# Altium PCB ESP32 with USBC PCB V1I1.PcbDoc (part 2 of 3)
Units mil, origin at the board's own origin, x right, y up, seen from the top; angles counter-clockwise.
Board outline 3020 x 1968.5 mil, 4 copper layers (L1, L2, L3, L4), stack 61.581 mil thick; 65 components, 78 nets, 406 pads, 141 vias.
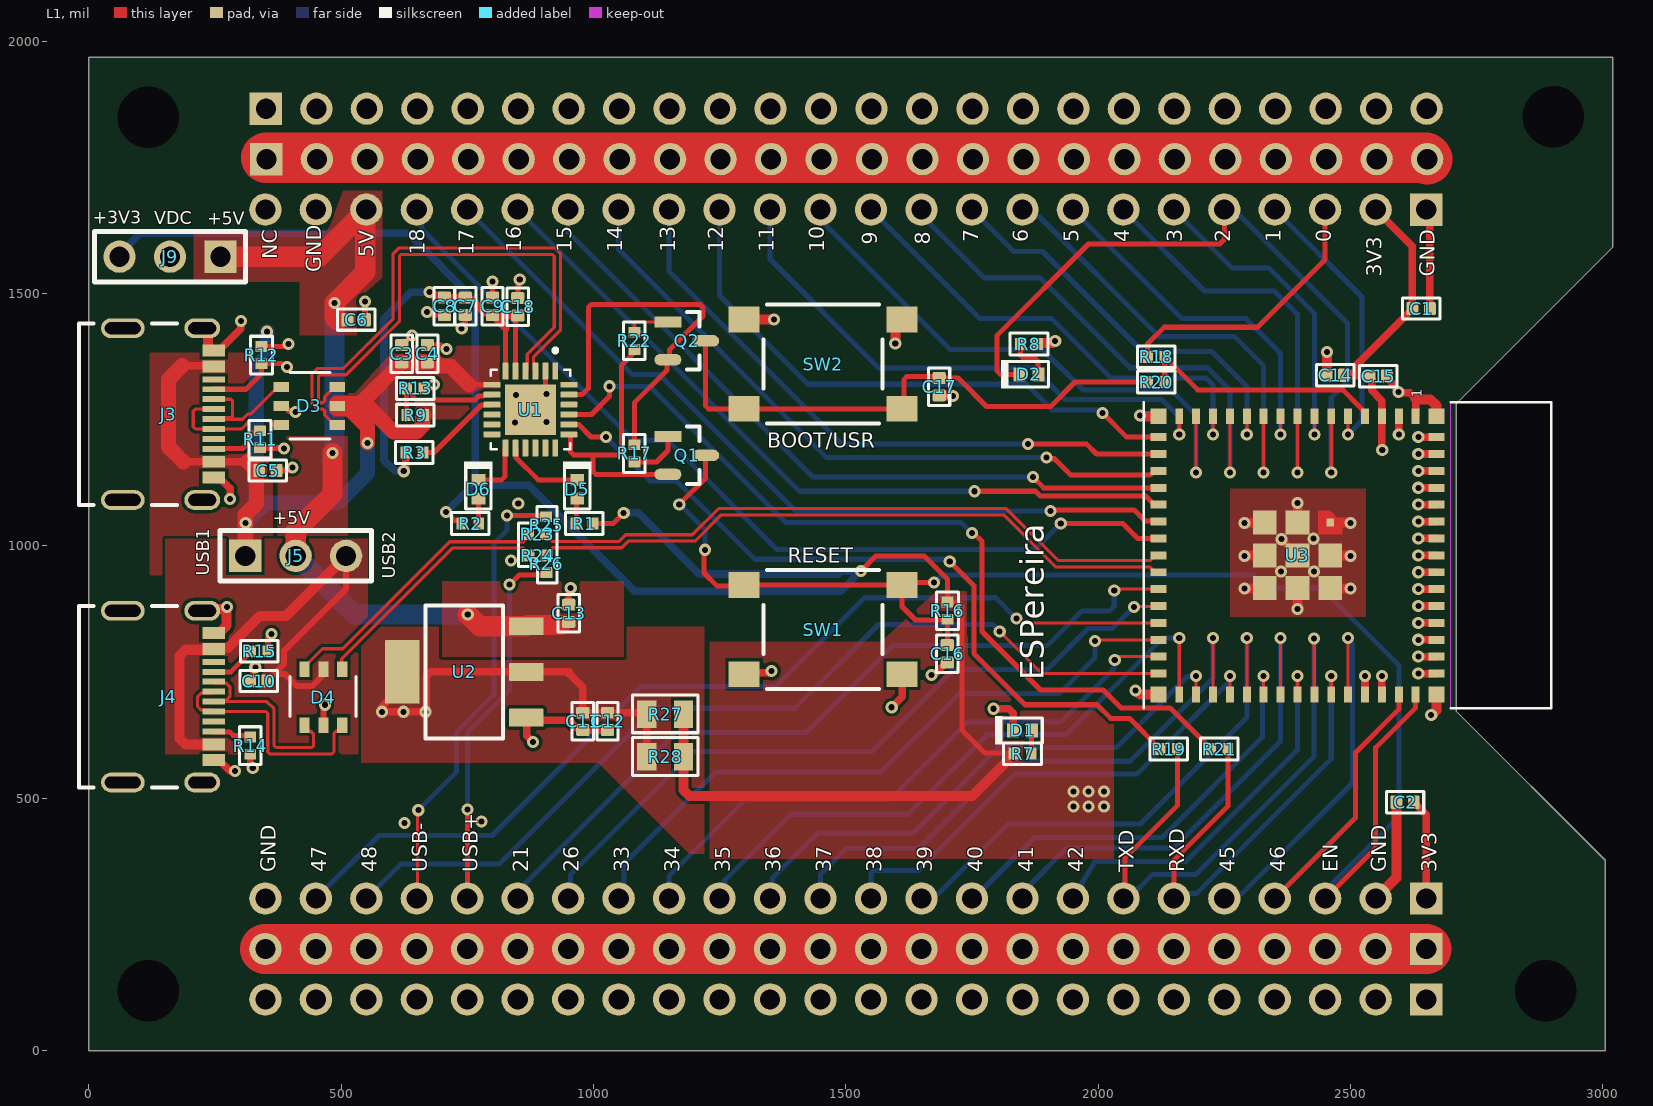
[diagram p0: L1 view]

## Part data (continued)
R9: library part RC0402FR-074K7L, "RES 4.7K OHM 1% 1/16W 0402", Case Code (Imperial)=0402, Case Code (Metric)=1005, Manufacturer="Yageo Group", Max Operating Temperature=155°C, Min Operating Temperature=-55°C, Power Rating=62.5mW, Supplier Part Number=311-4.7KLRDKR-ND, Temperature Coefficient=100ppm/°C, Tolerance=1%, Voltage Rating=50V, Case/Package=0402, Category="Chip SMD Resistors", China RoHS=Non-Compliant, ComponentLink1Description=https://datasheet.octopart.com:443/RC0402FR-074K7L-Yageo-datasheet-175887523.pdf?src-supplier=IHS, ComponentLink1URL=https://datasheet.octopart.com:443/RC0402FR-074K7L-Yageo-datasheet-175887523.pdf?src-supplier=IHS, ComponentLink2Description=https://datasheet.octopart.com:443/RC0402FR-074K7L-Yageo-datasheet-103092701.pdf?src-supplier=Upverter, ComponentLink2URL=https://datasheet.octopart.com:443/RC0402FR-074K7L-Yageo-datasheet-103092701.pdf?src-supplier=Upverter, ComponentLink3Description=https://datasheet.octopart.com:443/RC0402FR-074K7L-Yageo-datasheet-98239111.pdf?src-supplier=Upverter, ComponentLink3URL=https://datasheet.octopart.com:443/RC0402FR-074K7L-Yageo-datasheet-98239111.pdf?src-supplier=Upverter, ComponentLink4Description=https://datasheet.octopart.com:443/RC0402FR-074K7L-Yageo-Group-datasheet-190305687.pdf?src-supplier=Future+Electronics, ComponentLink4URL=https://datasheet.octopart.com:443/RC0402FR-074K7L-Yageo-Group-datasheet-190305687.pdf?src-supplier=Future+Electronics, ComponentLink5Description=https://datasheet.octopart.com:443/RC0402FR-074K7L-Yageo-datasheet-164759695.pdf?src-supplier=Future+Electronics, ComponentLink5URL=https://datasheet.octopart.com:443/RC0402FR-074K7L-Yageo-datasheet-164759695.pdf?src-supplier=Future+Electronics, ComponentLink6Description=https://datasheet.octopart.com:443/RC0402FR-074K7L-Yageo-datasheet-137700087.pdf?src-supplier=Future+Electronics, ComponentLink6URL=https://datasheet.octopart.com:443/RC0402FR-074K7L-Yageo-datasheet-137700087.pdf?src-supplier=Future+Electronics, ComponentLink7Description=https://datasheet.octopart.com:443/RC0402FR-074K7L-Yageo-Group-datasheet-190051977.pdf?src-supplier=Newark, ComponentLink7URL=https://datasheet.octopart.com:443/RC0402FR-074K7L-Yageo-Group-datasheet-190051977.pdf?src-supplier=Newark, ComponentLink8Description=https://datasheet.octopart.com:443/RC0402FR-074K7L-Yageo-datasheet-12531192.pdf?src-supplier=Newark, ComponentLink8URL=https://datasheet.octopart.com:443/RC0402FR-074K7L-Yageo-datasheet-12531192.pdf?src-supplier=Newark, ComponentLink9Description=https://datasheet.octopart.com:443/RC0402FR-074K7L-Yageo-datasheet-8324527.pdf?src-supplier=Newark, ComponentLink9URL=https://datasheet.octopart.com:443/RC0402FR-074K7L-Yageo-datasheet-8324527.pdf?src-supplier=Newark, ComponentLink10Description=https://datasheet.octopart.com:443/RC0402FR-074K7L-Yageo-datasheet-10408619.pdf?src-supplier=element14+APAC, ComponentLink10URL=https://datasheet.octopart.com:443/RC0402FR-074K7L-Yageo-datasheet-10408619.pdf?src-supplier=element14+APAC, ComponentLink11Description=https://datasheet.octopart.com:443/RC0402FR-074K7L-Yageo-datasheet-13691069.pdf?src-supplier=element14+APAC, ComponentLink11URL=https://datasheet.octopart.com:443/RC0402FR-074K7L-Yageo-datasheet-13691069.pdf?src-supplier=element14+APAC, ComponentLink12Description=https://datasheet.octopart.com:443/RC0402FR-074K7L-Yageo-datasheet-62067350.pdf?src-supplier=Farnell, ComponentLink12URL=https://datasheet.octopart.com:443/RC0402FR-074K7L-Yageo-datasheet-62067350.pdf?src-supplier=Farnell, ComponentLink13Description=https://datasheet.octopart.com:443/RC0402FR-074K7L-Yageo-datasheet-8329306.pdf?src-supplier=element14, ComponentLink13URL=https://datasheet.octopart.com:443/RC0402FR-074K7L-Yageo-datasheet-8329306.pdf?src-supplier=element14, ComponentLink14Description=https://datasheet.octopart.com:443/RC0402FR-074K7L-Yageo-Group-datasheet-189192902.pdf?src-supplier=LCSC, ComponentLink14URL=https://datasheet.octopart.com:443/RC0402FR-074K7L-Yageo-Group-datasheet-189192902.pdf?src-supplier=LCSC, ComponentLink15Description=https://datasheet.octopart.com:443/RC0402FR-074K7L-Yageo-datasheet-175423674.pdf?src-supplier=SOS+electronic, ComponentLink15URL=https://datasheet.octopart.com:443/RC0402FR-074K7L-Yageo-datasheet-175423674.pdf?src-supplier=SOS+electronic, ComponentLink16Description=https://datasheet.octopart.com:443/RC0402FR-074K7L-Yageo-datasheet-79472498.pdf?src-supplier=Megastar, ComponentLink16URL=https://datasheet.octopart.com:443/RC0402FR-074K7L-Yageo-datasheet-79472498.pdf?src-supplier=Megastar, ComponentLink17Description=https://datasheet.octopart.com/RC0402FR-074K7L-Yageo-datasheet-73766026.pdf, ComponentLink17URL=https://datasheet.octopart.com/RC0402FR-074K7L-Yageo-datasheet-73766026.pdf, ComponentLink18Description=http://sigma.octopart.com:80/conflict_mineral_statement/Yageo-company-3.pdf?src-supplier=Compliance+Statements, ComponentLink18URL=http://sigma.octopart.com:80/conflict_mineral_statement/Yageo-company-3.pdf?src-supplier=Compliance+Statements, ComponentLink19Description=http://sigma.octopart.com:80/rohs_statement/Yageo-company-2.pdf?src-supplier=Compliance+Statements, ComponentLink19URL=http://sigma.octopart.com:80/rohs_statement/Yageo-company-2.pdf?src-supplier=Compliance+Statements, Composition="Thick Film", Country of Origin="Mainland China, Taiwan", Depth=500µm, Export Control Classification Number (ECCN) Code=EAR99, Harmonized Tariff Schedule (HTS) Code=8533.21.00.30, Height=350µm, Introduction Date=2008-07-18, Lead Free="Lead Free", Length=1mm, Lifecycle Status=Production, Manufacturer Part Number=RC0402FR-074K7L, Military Standard=Not, Mounting Technology="Surface Mount", Number of Terminals=2, Packaging="Tape & Reel", Pins=2, Pricing="1=0.1, 10=0.021, 25=0.0152, 50=0.012, 100=0.0097, 250=0.0074, 500=0.00612, 1000=0.00512, 5000=0.00355 (USD)", REACH SVHC=Yes, RoHS=Compliant, Schedule B="8533210045, 8533210045|8533210045, 8533210045|8533210045|8533210045, 8533210045|8533210045|8533210045|8533210045", Stock=2941109, Supplier=DigiKey, Termination=SMD/SMT, Voltage Rating (AC)=50V, Voltage Rating (DC)=50V, Width=500µm, Working Voltage=50V
R11 R12 R14 R15: library part AC0402FR-075K1L, "5.1 kOhms ±1% 0,063W, 1/16W Resistor de chip 0402 (métrico 1005) AEC-Q200 automotivo, resistente a umidade Filme grosso", Case Code (Imperial)=0402, Case Code (Metric)=1005, Manufacturer="Yageo Group", Max Operating Temperature=155°C, Max Power Dissipation=63mW, Min Operating Temperature=-55°C, Power Rating=62.5mW, Ratings=AEC-Q200, Supplier Part Number=YAG3503DKR-ND, Temperature Coefficient=100ppm/°C, Tolerance=1%, Voltage Rating=50V, Case/Package=0402, Category="Chip SMD Resistors", China RoHS=Non-Compliant, ComponentLink1Description=https://datasheet.octopart.com:443/AC0402FR-075K1L-Yageo-datasheet-182189377.pdf?src-supplier=IHS, ComponentLink1URL=https://datasheet.octopart.com:443/AC0402FR-075K1L-Yageo-datasheet-182189377.pdf?src-supplier=IHS, ComponentLink2Description=https://datasheet.octopart.com:443/AC0402FR-075K1L-Yageo-datasheet-83209224.pdf?src-supplier=Upverter, ComponentLink2URL=https://datasheet.octopart.com:443/AC0402FR-075K1L-Yageo-datasheet-83209224.pdf?src-supplier=Upverter, ComponentLink3Description=https://datasheet.octopart.com:443/AC0402FR-075K1L-Yageo-datasheet-178509465.pdf?src-supplier=Newark, ComponentLink3URL=https://datasheet.octopart.com:443/AC0402FR-075K1L-Yageo-datasheet-178509465.pdf?src-supplier=Newark, ComponentLink4Description=https://datasheet.octopart.com/AC0402FR-075K1L-Yageo-datasheet-12512238.pdf, ComponentLink4URL=https://datasheet.octopart.com/AC0402FR-075K1L-Yageo-datasheet-12512238.pdf, ComponentLink5Description=https://datasheet.octopart.com:443/AC0402FR-075K1L-Yageo-Group-datasheet-189830439.pdf?src-supplier=Future+Electronics, ComponentLink5URL=https://datasheet.octopart.com:443/AC0402FR-075K1L-Yageo-Group-datasheet-189830439.pdf?src-supplier=Future+Electronics, ComponentLink6Description=https://datasheet.octopart.com:443/AC0402FR-075K1L-Yageo-datasheet-166720450.pdf?src-supplier=Future+Electronics, ComponentLink6URL=https://datasheet.octopart.com:443/AC0402FR-075K1L-Yageo-datasheet-166720450.pdf?src-supplier=Future+Electronics, ComponentLink7Description=https://datasheet.octopart.com:443/AC0402FR-075K1L-Yageo-datasheet-151884373.pdf?src-supplier=Future+Electronics, ComponentLink7URL=https://datasheet.octopart.com:443/AC0402FR-075K1L-Yageo-datasheet-151884373.pdf?src-supplier=Future+Electronics, ComponentLink8Description=https://datasheet.octopart.com:443/AC0402FR-075K1L-Yageo-datasheet-137699919.pdf?src-supplier=Future+Electronics, ComponentLink8URL=https://datasheet.octopart.com:443/AC0402FR-075K1L-Yageo-datasheet-137699919.pdf?src-supplier=Future+Electronics, ComponentLink9Description=https://datasheet.octopart.com:443/AC0402FR-075K1L-Yageo-datasheet-24580492.pdf?src-supplier=Future+Electronics, ComponentLink9URL=https://datasheet.octopart.com:443/AC0402FR-075K1L-Yageo-datasheet-24580492.pdf?src-supplier=Future+Electronics, ComponentLink10Description=https://datasheet.octopart.com:443/AC0402FR-075K1L-Yageo-datasheet-13029202.pdf?src-supplier=Future+Electronics, ComponentLink10URL=https://datasheet.octopart.com:443/AC0402FR-075K1L-Yageo-datasheet-13029202.pdf?src-supplier=Future+Electronics, ComponentLink11Description=https://datasheet.octopart.com:443/AC0402FR-075K1L-Yageo-Group-datasheet-188689268.pdf?src-supplier=LCSC, ComponentLink11URL=https://datasheet.octopart.com:443/AC0402FR-075K1L-Yageo-Group-datasheet-188689268.pdf?src-supplier=LCSC, ComponentLink12Description=https://datasheet.octopart.com:443/AC0402FR-075K1L-Yageo-Group-datasheet-164768995.pdf?src-supplier=ODG+(Origin+Data+Global), ComponentLink12URL=https://datasheet.octopart.com:443/AC0402FR-075K1L-Yageo-Group-datasheet-164768995.pdf?src-supplier=ODG+(Origin+Data+Global), ComponentLink13Description=http://sigma.octopart.com:80/conflict_mineral_statement/Yageo-company-3.pdf?src-supplier=Compliance+Statements, ComponentLink13URL=http://sigma.octopart.com:80/conflict_mineral_statement/Yageo-company-3.pdf?src-supplier=Compliance+Statements, ComponentLink14Description=http://sigma.octopart.com:80/rohs_statement/Yageo-company-2.pdf?src-supplier=Compliance+Statements, ComponentLink14URL=http://sigma.octopart.com:80/rohs_statement/Yageo-company-2.pdf?src-supplier=Compliance+Statements, Composition="Thick Film", Country of Origin="Mainland China, Taiwan", Depth=500µm, Export Control Classification Number (ECCN) Code=EAR99, Features="Automotive AEC-Q200, Moisture Resistant", Harmonized Tariff Schedule (HTS) Code=8533.21.00.30, Height=320µm, Introduction Date=2012-04-10, Lead Free="Lead Free", Length=1mm, Lifecycle Status=Production, Manufacturer Part Number=AC0402FR-075K1L, Military Standard=Not, Mounting Technology="Surface Mount", Number of Terminals=2, Number of Terminations=2, Pricing="1=0.11, 10=0.025, 25=0.0184, 50=0.0148, 100=0.012, 250=0.00928, 500=0.0077, 1000=0.00649, 5000=0.00457 (USD)", REACH SVHC=Yes, RoHS=Compliant, Schedule B="8533210045, 8533210045|8533210045|8533210045|8533210045|8533210045|8533210045|8533210045|8533210045|8533210045|8533210045|8533210045|8533210045|8533210045|8533210045|8533210045|8533210045|8533210045|8533210045|8533210045|8533210045|8533210045|8533210045|8533210045|85", Supplier=DigiKey, Width=500µm, Working Voltage=50V
R13 R16 R17 R22: library part AC0402FR-0710KL, "10 kOhms ±1% 0,063W, 1/16W Resistor de chip 0402 (métrico 1005) AEC-Q200 automotivo, resistente a umidade Filme grosso", Case Code (Imperial)=0402, Case Code (Metric)=1005, Manufacturer="Yageo Group", Max Operating Temperature=155°C, Max Power Dissipation=63mW, Min Operating Temperature=-55°C, Power Rating=62.5mW, Ratings=AEC-Q200, Supplier Part Number=YAG3436DKR-ND, Temperature Coefficient=100ppm/°C, Tolerance=1%, Voltage Rating=50V, Case/Package=0402, Category="Chip SMD Resistors", China RoHS=Non-Compliant, ComponentLink1Description=https://datasheet.octopart.com:443/AC0402FR-0710KL-Yageo-datasheet-182189377.pdf?src-supplier=IHS, ComponentLink1URL=https://datasheet.octopart.com:443/AC0402FR-0710KL-Yageo-datasheet-182189377.pdf?src-supplier=IHS, ComponentLink2Description=https://datasheet.octopart.com:443/AC0402FR-0710KL-Yageo-datasheet-83209224.pdf?src-supplier=Upverter, ComponentLink2URL=https://datasheet.octopart.com:443/AC0402FR-0710KL-Yageo-datasheet-83209224.pdf?src-supplier=Upverter, ComponentLink3Description=https://datasheet.octopart.com:443/AC0402FR-0710KL-Yageo-datasheet-178509465.pdf?src-supplier=Newark, ComponentLink3URL=https://datasheet.octopart.com:443/AC0402FR-0710KL-Yageo-datasheet-178509465.pdf?src-supplier=Newark, ComponentLink4Description=https://datasheet.octopart.com:443/AC0402FR-0710KL-Yageo-datasheet-166720450.pdf?src-supplier=JRH+Electronics, ComponentLink4URL=https://datasheet.octopart.com:443/AC0402FR-0710KL-Yageo-datasheet-166720450.pdf?src-supplier=JRH+Electronics, ComponentLink5Description=https://datasheet.octopart.com:443/AC0402FR-0710KL-Yageo-datasheet-151884373.pdf?src-supplier=Future+Electronics, ComponentLink5URL=https://datasheet.octopart.com:443/AC0402FR-0710KL-Yageo-datasheet-151884373.pdf?src-supplier=Future+Electronics, ComponentLink6Description=https://datasheet.octopart.com:443/AC0402FR-0710KL-Yageo-Group-datasheet-189830439.pdf?src-supplier=Future+Electronics, ComponentLink6URL=https://datasheet.octopart.com:443/AC0402FR-0710KL-Yageo-Group-datasheet-189830439.pdf?src-supplier=Future+Electronics, ComponentLink7Description=https://datasheet.octopart.com:443/AC0402FR-0710KL-Yageo-datasheet-137699919.pdf?src-supplier=Future+Electronics, ComponentLink7URL=https://datasheet.octopart.com:443/AC0402FR-0710KL-Yageo-datasheet-137699919.pdf?src-supplier=Future+Electronics, ComponentLink8Description=https://datasheet.octopart.com:443/AC0402FR-0710KL-Yageo-datasheet-24580492.pdf?src-supplier=Future+Electronics, ComponentLink8URL=https://datasheet.octopart.com:443/AC0402FR-0710KL-Yageo-datasheet-24580492.pdf?src-supplier=Future+Electronics, ComponentLink9Description=https://datasheet.octopart.com:443/AC0402FR-0710KL-Yageo-datasheet-13029202.pdf?src-supplier=Future+Electronics, ComponentLink9URL=https://datasheet.octopart.com:443/AC0402FR-0710KL-Yageo-datasheet-13029202.pdf?src-supplier=Future+Electronics, ComponentLink10Description=https://datasheet.octopart.com/AC0402FR-0710KL-Yageo-datasheet-12512238.pdf, ComponentLink10URL=https://datasheet.octopart.com/AC0402FR-0710KL-Yageo-datasheet-12512238.pdf, ComponentLink11Description=https://datasheet.octopart.com:443/AC0402FR-0710KL-Yageo-Group-datasheet-164768995.pdf?src-supplier=ODG+(Origin+Data+Global), ComponentLink11URL=https://datasheet.octopart.com:443/AC0402FR-0710KL-Yageo-Group-datasheet-164768995.pdf?src-supplier=ODG+(Origin+Data+Global), ComponentLink12Description=https://datasheet.octopart.com:443/AC0402FR-0710KL-Yageo-datasheet-128677448.pdf?src-supplier=X-ON, ComponentLink12URL=https://datasheet.octopart.com:443/AC0402FR-0710KL-Yageo-datasheet-128677448.pdf?src-supplier=X-ON, ComponentLink13Description=http://sigma.octopart.com:80/conflict_mineral_statement/Yageo-company-3.pdf?src-supplier=Compliance+Statements, ComponentLink13URL=http://sigma.octopart.com:80/conflict_mineral_statement/Yageo-company-3.pdf?src-supplier=Compliance+Statements, ComponentLink14Description=http://sigma.octopart.com:80/rohs_statement/Yageo-company-2.pdf?src-supplier=Compliance+Statements, ComponentLink14URL=http://sigma.octopart.com:80/rohs_statement/Yageo-company-2.pdf?src-supplier=Compliance+Statements, Composition="Thick Film", Country of Origin="Mainland China, Taiwan", Depth=500µm, Export Control Classification Number (ECCN) Code=EAR99, Features="Automotive AEC-Q200, Moisture Resistant", Harmonized Tariff Schedule (HTS) Code=8533.21.00.30, Height=320µm, Introduction Date=2012-04-10, Lead Free="Lead Free", Length=1mm, Lifecycle Status=Production, Manufacturer Part Number=AC0402FR-0710KL, Military Standard=Not, Mounting Technology="Surface Mount", Number of Terminals=2, Number of Terminations=2, Packaging="Tape & Reel", Pricing="1=0.1, 10=0.024, 25=0.0176, 50=0.014, 100=0.0114, 250=0.00876, 500=0.00726, 1000=0.00612, 5000=0.00431 (USD)", REACH SVHC=Yes, RoHS=Compliant, Schedule B="8533210045, 8533210045|8533210045|8533210045|8533210045|8533210045|8533210045|8533210045|8533210045|8533210045|8533210045|8533210045|8533210045|8533210045|8533210045|8533210045|8533210045|8533210045|8533210045|8533210045, 8533210045|8533210045|8533210045|8533210045|8533210045|8533210045|8533210045|8533210045|8533210045|8533210045|8533210045|8533210045|8533210045|8533210045|8533210045|8533210045|8533210045|8533210045|8533210045|8533210045|8533210045|8533210045|8533210045|85", Stock=2542190, Supplier=DigiKey, Termination=SMD/SMT, Width=500µm, Working Voltage=50V
R18 R20: library part RC0402FR-0727RL, "27 Ohms ±1% 0,063W, 1/16W Resistor de chip 0402 (métrico 1005) Resistente à umidade Filme grosso", Case Code (Imperial)=0402, Case Code (Metric)=1005, Manufacturer="Yageo Group", Max Operating Temperature=155°C, Max Power Dissipation=63mW, Min Operating Temperature=-55°C, Power Rating=62.5mW, Supplier Part Number=YAG3086CT-ND, Temperature Coefficient=100ppm/°C, Tolerance=1%, Voltage Rating=50V, Case/Package=0402, Category="Chip SMD Resistors", China RoHS=Non-Compliant, ComponentLink1Description=https://datasheet.octopart.com:443/RC0402FR-0727RL-Yageo-datasheet-175887523.pdf?src-supplier=Newark, ComponentLink1URL=https://datasheet.octopart.com:443/RC0402FR-0727RL-Yageo-datasheet-175887523.pdf?src-supplier=Newark, ComponentLink2Description=https://datasheet.octopart.com:443/RC0402FR-0727RL-Yageo-datasheet-8324527.pdf?src-supplier=Newark, ComponentLink2URL=https://datasheet.octopart.com:443/RC0402FR-0727RL-Yageo-datasheet-8324527.pdf?src-supplier=Newark, ComponentLink3Description=https://datasheet.octopart.com:443/RC0402FR-0727RL-Yageo-datasheet-103092701.pdf?src-supplier=Upverter, ComponentLink3URL=https://datasheet.octopart.com:443/RC0402FR-0727RL-Yageo-datasheet-103092701.pdf?src-supplier=Upverter, ComponentLink4Description=https://datasheet.octopart.com:443/RC0402FR-0727RL-Yageo-datasheet-10408619.pdf?src-supplier=element14+APAC, ComponentLink4URL=https://datasheet.octopart.com:443/RC0402FR-0727RL-Yageo-datasheet-10408619.pdf?src-supplier=element14+APAC, ComponentLink5Description=https://datasheet.octopart.com:443/RC0402FR-0727RL-Yageo-datasheet-62067350.pdf?src-supplier=element14+APAC, ComponentLink5URL=https://datasheet.octopart.com:443/RC0402FR-0727RL-Yageo-datasheet-62067350.pdf?src-supplier=element14+APAC, ComponentLink6Description=https://datasheet.octopart.com:443/RC0402FR-0727RL-Yageo-Group-datasheet-189192902.pdf?src-supplier=LCSC, ComponentLink6URL=https://datasheet.octopart.com:443/RC0402FR-0727RL-Yageo-Group-datasheet-189192902.pdf?src-supplier=LCSC, ComponentLink7Description=https://datasheet.octopart.com:443/RC0402FR-0727RL-Yageo-Group-datasheet-176638170.pdf?src-supplier=Future+Electronics, ComponentLink7URL=https://datasheet.octopart.com:443/RC0402FR-0727RL-Yageo-Group-datasheet-176638170.pdf?src-supplier=Future+Electronics, ComponentLink8Description=https://datasheet.octopart.com:443/RC0402FR-0727RL-Yageo-datasheet-164759695.pdf?src-supplier=Future+Electronics, ComponentLink8URL=https://datasheet.octopart.com:443/RC0402FR-0727RL-Yageo-datasheet-164759695.pdf?src-supplier=Future+Electronics, ComponentLink9Description=https://datasheet.octopart.com:443/RC0402FR-0727RL-Yageo-datasheet-137700087.pdf?src-supplier=Future+Electronics, ComponentLink9URL=https://datasheet.octopart.com:443/RC0402FR-0727RL-Yageo-datasheet-137700087.pdf?src-supplier=Future+Electronics, ComponentLink10Description=https://datasheet.octopart.com:443/RC0402FR-0727RL-Yageo-datasheet-12531192.pdf?src-supplier=Future+Electronics, ComponentLink10URL=https://datasheet.octopart.com:443/RC0402FR-0727RL-Yageo-datasheet-12531192.pdf?src-supplier=Future+Electronics, ComponentLink11Description=https://datasheet.octopart.com:443/RC0402FR-0727RL-Yageo-datasheet-175423674.pdf?src-supplier=SOS+electronic, ComponentLink11URL=https://datasheet.octopart.com:443/RC0402FR-0727RL-Yageo-datasheet-175423674.pdf?src-supplier=SOS+electronic, ComponentLink12Description=https://datasheet.octopart.com:443/RC0402FR-0727RL-Yageo-datasheet-8329306.pdf?src-supplier=SOS+electronic, ComponentLink12URL=https://datasheet.octopart.com:443/RC0402FR-0727RL-Yageo-datasheet-8329306.pdf?src-supplier=SOS+electronic, ComponentLink13Description=https://datasheet.octopart.com:443/RC0402FR-0727RL-Yageo-datasheet-148775077.pdf?src-supplier=TME, ComponentLink13URL=https://datasheet.octopart.com:443/RC0402FR-0727RL-Yageo-datasheet-148775077.pdf?src-supplier=TME, ComponentLink14Description=https://datasheet.octopart.com/RC0402FR-0727RL-Yageo-datasheet-73766026.pdf, ComponentLink14URL=https://datasheet.octopart.com/RC0402FR-0727RL-Yageo-datasheet-73766026.pdf, ComponentLink15Description=http://sigma.octopart.com:80/conflict_mineral_statement/Yageo-company-3.pdf?src-supplier=Compliance+Statements, ComponentLink15URL=http://sigma.octopart.com:80/conflict_mineral_statement/Yageo-company-3.pdf?src-supplier=Compliance+Statements, ComponentLink16Description=http://sigma.octopart.com:80/rohs_statement/Yageo-company-2.pdf?src-supplier=Compliance+Statements, ComponentLink16URL=http://sigma.octopart.com:80/rohs_statement/Yageo-company-2.pdf?src-supplier=Compliance+Statements, Composition="Thick Film", Country of Origin="Mainland China, Taiwan", Depth=500µm, Export Control Classification Number (ECCN) Code=EAR99, Features="Moisture Resistant", Harmonized Tariff Schedule (HTS) Code=8533.21.00.30, Height=350µm, Introduction Date=2008-07-18, Lead Free="Lead Free", Length=1mm, Lifecycle Status=Production, Manufacturer Part Number=RC0402FR-0727RL, Military Standard=Not, Mounting Technology="Surface Mount", Number of Terminals=2, Number of Terminations=2, Pins=2, Pricing="1=0.1, 10=0.021, 25=0.0152, 50=0.012, 100=0.0097, 250=0.0074, 500=0.00612, 1000=0.00512, 5000=0.00355 (USD)", REACH SVHC=Yes, RoHS=Compliant, Schedule B="8533210045, 8533210045|8533210045, 8533210045|8533210045|8533210045, 8533210045|8533210045|8533210045|8533210045", Stock=186375, Supplier=DigiKey, Termination=SMD/SMT, Voltage Rating (AC)=50V, Voltage Rating (DC)=50V, Weight=652.039032µg, Width=500µm, Working Voltage=50V
R19 R21 R23 R24 R25 R26: library part RC0402JR-070RL, "0 Ohms Jumper Resistor de chip 0402 (métrico 1005) Resistente à umidade Filme grosso", Case Code (Imperial)=0402, Manufacturer="Yageo Group", Max Operating Temperature=155°C, Max Power Dissipation=63mW, Min Operating Temperature=-55°C, Power Rating=62.5mW, Supplier Part Number=311-0.0JRDKR-ND, Temperature Coefficient=200ppm/°C, Tolerance=5%, Voltage Rating=50V, Case/Package=0402, Category="Chip SMD Resistors", China RoHS=Non-Compliant, ComponentLink1Description=https://datasheet.octopart.com:443/RC0402JR-070RL-Yageo-datasheet-182189538.pdf?src-supplier=IHS, ComponentLink1URL=https://datasheet.octopart.com:443/RC0402JR-070RL-Yageo-datasheet-182189538.pdf?src-supplier=IHS, ComponentLink2Description=https://datasheet.octopart.com:443/RC0402JR-070RL-Yageo-datasheet-10408619.pdf?src-supplier=Newark, ComponentLink2URL=https://datasheet.octopart.com:443/RC0402JR-070RL-Yageo-datasheet-10408619.pdf?src-supplier=Newark, ComponentLink3Description=https://datasheet.octopart.com:443/RC0402JR-070RL-Yageo-Group-datasheet-181964826.pdf?src-supplier=Newark, ComponentLink3URL=https://datasheet.octopart.com:443/RC0402JR-070RL-Yageo-Group-datasheet-181964826.pdf?src-supplier=Newark, ComponentLink4Description=https://datasheet.octopart.com:443/RC0402JR-070RL-Yageo-Group-datasheet-190305687.pdf?src-supplier=Future+Electronics, ComponentLink4URL=https://datasheet.octopart.com:443/RC0402JR-070RL-Yageo-Group-datasheet-190305687.pdf?src-supplier=Future+Electronics, ComponentLink5Description=https://datasheet.octopart.com:443/RC0402JR-070RL-Yageo-datasheet-164759695.pdf?src-supplier=Future+Electronics, ComponentLink5URL=https://datasheet.octopart.com:443/RC0402JR-070RL-Yageo-datasheet-164759695.pdf?src-supplier=Future+Electronics, ComponentLink6Description=https://datasheet.octopart.com:443/RC0402JR-070RL-Yageo-datasheet-137700087.pdf?src-supplier=Future+Electronics, ComponentLink6URL=https://datasheet.octopart.com:443/RC0402JR-070RL-Yageo-datasheet-137700087.pdf?src-supplier=Future+Electronics, ComponentLink7Description=https://datasheet.octopart.com:443/RC0402JR-070RL-Yageo-datasheet-12531192.pdf?src-supplier=Seeed+Studio, ComponentLink7URL=https://datasheet.octopart.com:443/RC0402JR-070RL-Yageo-datasheet-12531192.pdf?src-supplier=Seeed+Studio, ComponentLink8Description=https://datasheet.octopart.com:443/RC0402JR-070RL-Yageo-datasheet-8324527.pdf?src-supplier=TME, ComponentLink8URL=https://datasheet.octopart.com:443/RC0402JR-070RL-Yageo-datasheet-8324527.pdf?src-supplier=TME, ComponentLink9Description=https://datasheet.octopart.com:443/RC0402JR-070RL-Yageo-datasheet-62067350.pdf?src-supplier=Farnell, ComponentLink9URL=https://datasheet.octopart.com:443/RC0402JR-070RL-Yageo-datasheet-62067350.pdf?src-supplier=Farnell, ComponentLink10Description=https://datasheet.octopart.com:443/RC0402JR-070RL-Yageo-datasheet-8329306.pdf?src-supplier=element14, ComponentLink10URL=https://datasheet.octopart.com:443/RC0402JR-070RL-Yageo-datasheet-8329306.pdf?src-supplier=element14, ComponentLink11Description=https://datasheet.octopart.com:443/RC0402JR-070RL-Yageo-datasheet-505231.pdf?src-supplier=element14, ComponentLink11URL=https://datasheet.octopart.com:443/RC0402JR-070RL-Yageo-datasheet-505231.pdf?src-supplier=element14, ComponentLink12Description=https://datasheet.octopart.com:443/RC0402JR-070RL-Yageo-datasheet-175423674.pdf?src-supplier=SOS+electronic, ComponentLink12URL=https://datasheet.octopart.com:443/RC0402JR-070RL-Yageo-datasheet-175423674.pdf?src-supplier=SOS+electronic, ComponentLink13Description=https://datasheet.octopart.com/RC0402JR-070RL-Yageo-datasheet-73766026.pdf, ComponentLink13URL=https://datasheet.octopart.com/RC0402JR-070RL-Yageo-datasheet-73766026.pdf, ComponentLink14Description=http://sigma.octopart.com:80/conflict_mineral_statement/Yageo-company-3.pdf?src-supplier=Compliance+Statements, ComponentLink14URL=http://sigma.octopart.com:80/conflict_mineral_statement/Yageo-company-3.pdf?src-supplier=Compliance+Statements, ComponentLink15Description=http://sigma.octopart.com:80/rohs_statement/Yageo-company-2.pdf?src-supplier=Compliance+Statements, ComponentLink15URL=http://sigma.octopart.com:80/rohs_statement/Yageo-company-2.pdf?src-supplier=Compliance+Statements, Composition="Thick Film", Contact Plating=Tin, Depth=500µm, Features="Moisture Resistant", Height=350µm, Lead Free="Lead Free", Length=1mm, Lifecycle Status=Production, Manufacturer Part Number=RC0402JR-070RL, Military Standard=Not, Mounting Technology="Surface Mount", Number of Terminals=2, Number of Terminations=2, Packaging="Tape & Reel", Pins=2, Pricing="1=0.1, 10=0.010, 25=0.0064, 50=0.0056, 100=0.0048, 250=0.00404, 500=0.00356, 1000=0.00313, 5000=0.00237 (USD)", Radiation Hardening=No, REACH SVHC=Yes, RoHS=Compliant, Schedule B="8533290000, 8533290000|8533290000, 8533290000|8533290000|8533290000, 8533290000|8533290000|8533290000|8533290000", Stock=7130979, Supplier=DigiKey, Termination=SMD/SMT, Voltage Rating (DC)=50V, Width=500µm
R27 R28: library part CR0805AJ/-000EAS, "RESA-AS 0805 0R JUMPER 125MW", Case/Package=0805, Manufacturer=Bourns, Max Operating Temperature=155°C, Min Operating Temperature=-55°C, Power Rating=125mW, Ratings=AEC-Q200, Supplier Part Number=CR0805AJ/-000EASCT-ND, Temperature Coefficient=400ppm/°C, Tolerance=5%, Voltage Rating=150V, Category="Chip SMD Resistors", China RoHS=Non-Compliant, ComponentLink1Description=https://datasheet.octopart.com:443/CR0805AJ--000EAS-Bourns-datasheet-181955238.pdf?src-supplier=IHS, ComponentLink1URL=https://datasheet.octopart.com:443/CR0805AJ--000EAS-Bourns-datasheet-181955238.pdf?src-supplier=IHS, ComponentLink2Description=https://datasheet.octopart.com:443/CR0805AJ--000EAS-Bourns-datasheet-181955240.pdf?src-supplier=IHS, ComponentLink2URL=https://datasheet.octopart.com:443/CR0805AJ--000EAS-Bourns-datasheet-181955240.pdf?src-supplier=IHS, ComponentLink3Description=https://datasheet.octopart.com:443/CR0805AJ--000EAS-Bourns-datasheet-166097895.pdf?src-supplier=Electro+Sonic, ComponentLink3URL=https://datasheet.octopart.com:443/CR0805AJ--000EAS-Bourns-datasheet-166097895.pdf?src-supplier=Electro+Sonic, ComponentLink4Description=https://datasheet.octopart.com:443/CR0805AJ--000EAS-Bourns-datasheet-136430691.pdf?src-supplier=Electro+Sonic, ComponentLink4URL=https://datasheet.octopart.com:443/CR0805AJ--000EAS-Bourns-datasheet-136430691.pdf?src-supplier=Electro+Sonic, ComponentLink5Description=https://datasheet.octopart.com:443/CR0805AJ--000EAS-Bourns-datasheet-177039331.pdf?src-supplier=Burklin+Elektronik, ComponentLink5URL=https://datasheet.octopart.com:443/CR0805AJ--000EAS-Bourns-datasheet-177039331.pdf?src-supplier=Burklin+Elektronik, ComponentLink6Description=http://sigma.octopart.com:80/conflict_mineral_statement/Bourns-company-36.pdf?src-supplier=Compliance+Statements, ComponentLink6URL=http://sigma.octopart.com:80/conflict_mineral_statement/Bourns-company-36.pdf?src-supplier=Compliance+Statements, Composition="Thick Film", Country of Origin=Taiwan, Export Control Classification Number (ECCN) Code=EAR99, Harmonized Tariff Schedule (HTS) Code=8533.21.00.30, Height=500µm, Introduction Date=2019-05-31, Length=2mm, Lifecycle Status=Production, Manufacturer Part Number=CR0805AJ/-000EAS, Mounting Technology="Surface Mount", Number of Terminals=2, Pricing="1=0.1, 10=0.039, 25=0.0296, 50=0.024, 100=0.0199, 250=0.01576, 500=0.01342, 1000=0.01156 (USD)", REACH SVHC=Yes, RoHS=Compliant, Stock=47987, Supplier=DigiKey, Voltage Rating (DC)=150V, Width=1.25mm
SW1 SW2: "6 x 6 mm, 5 mm Actuator Height Off PCB, 160 gf, Black, Surface Mount, SPST, Tactile Switch", Manufacturer="Same Sky", Supplier Part Number=2223-TS04-66-50-BK-160-SMT-TR-ND, Category="Tactile Switches", ComponentLink1Description=https://datasheet.octopart.com:443/TS04-66-50-BK-160-SMT-TR-Same-Sky-datasheet-183540778.pdf?src-supplier=Same+Sky, ComponentLink1URL=https://datasheet.octopart.com:443/TS04-66-50-BK-160-SMT-TR-Same-Sky-datasheet-183540778.pdf?src-supplier=Same+Sky, ComponentLink2Description=https://datasheet.octopart.com:443/TS04-66-50-BK-160-SMT-TR-Same-Sky-datasheet-181920469.pdf?src-supplier=Same+Sky, ComponentLink2URL=https://datasheet.octopart.com:443/TS04-66-50-BK-160-SMT-TR-Same-Sky-datasheet-181920469.pdf?src-supplier=Same+Sky, ComponentLink3Description=https://datasheet.octopart.com:443/TS04-66-50-BK-160-SMT-TR-CUI-Devices-datasheet-175928975.pdf?src-supplier=Same+Sky, ComponentLink3URL=https://datasheet.octopart.com:443/TS04-66-50-BK-160-SMT-TR-CUI-Devices-datasheet-175928975.pdf?src-supplier=Same+Sky, ComponentLink4Description=https://datasheet.octopart.com:443/TS04-66-50-BK-160-SMT-TR-CUI-Devices-datasheet-155929909.pdf?src-supplier=Same+Sky, ComponentLink4URL=https://datasheet.octopart.com:443/TS04-66-50-BK-160-SMT-TR-CUI-Devices-datasheet-155929909.pdf?src-supplier=Same+Sky, ComponentLink5Description=https://datasheet.octopart.com:443/TS04-66-50-BK-160-SMT-TR-CUI-Devices-datasheet-180438940.pdf?src-supplier=IHS, ComponentLink5URL=https://datasheet.octopart.com:443/TS04-66-50-BK-160-SMT-TR-CUI-Devices-datasheet-180438940.pdf?src-supplier=IHS, ComponentLink6Description=https://datasheet.octopart.com:443/TS04-66-50-BK-160-SMT-TR-Same-Sky-datasheet-192884241.pdf?src-supplier=Farnell, ComponentLink6URL=https://datasheet.octopart.com:443/TS04-66-50-BK-160-SMT-TR-Same-Sky-datasheet-192884241.pdf?src-supplier=Farnell, ComponentLink7Description=https://datasheet.octopart.com:443/TS04-66-50-BK-160-SMT-TR-Same-Sky-datasheet-182881590.pdf?src-supplier=Master+Electronics, ComponentLink7URL=https://datasheet.octopart.com:443/TS04-66-50-BK-160-SMT-TR-Same-Sky-datasheet-182881590.pdf?src-supplier=Master+Electronics, ComponentLink8Description=https://datasheet.octopart.com:443/TS04-66-50-BK-160-SMT-TR-Same-Sky-datasheet-189105765.pdf?src-supplier=Master+Electronics, ComponentLink8URL=https://datasheet.octopart.com:443/TS04-66-50-BK-160-SMT-TR-Same-Sky-datasheet-189105765.pdf?src-supplier=Master+Electronics, ComponentLink9Description=https://datasheet.octopart.com:443/TS04-66-50-BK-160-SMT-TR-Same-Sky-datasheet-188930959.pdf?src-supplier=TME, ComponentLink9URL=https://datasheet.octopart.com:443/TS04-66-50-BK-160-SMT-TR-Same-Sky-datasheet-188930959.pdf?src-supplier=TME, ComponentLink10Description=https://octopart.com:443/opatz8j6/c1?t=wXATGi29fPEBEaziTelqDuU4PjQuUS8e8k50uqTGR8-f8PgSBgVO23hGk56Y_9yeRFefFNyFnsWboRRpBFO4Z5GgYLXGLoSxKwNwRa_8Tp-KukLkkmWWLplkTid4u4PgvbN9QXkqZx3SvyHDehfYxERuFRNpFvwLRToYdcioo1Dg-fIU-JxuJPsKb2-K_Po4qppweD5kOyk7OvfzQ6TECoWM0aQoKTilEezgdpbRxwdJdsQr6i-FhRWHfUjlqSsVHg459MHKJuvnfhywZNmHdO84fN_K0pIzXyk-L2zKyvuCT_vzM6c4F_4O5jG0QDPBr-XwNBoTKaJRAcwbZ4CzY9PqBRYaKyEwG8v_COsLzutLKKxY4UQ&src-supplier=Compliance+Statements, ComponentLink10URL=https://octopart.com:443/opatz8j6/c1?t=wXATGi29fPEBEaziTelqDuU4PjQuUS8e8k50uqTGR8-f8PgSBgVO23hGk56Y_9yeRFefFNyFnsWboRRpBFO4Z5GgYLXGLoSxKwNwRa_8Tp-KukLkkmWWLplkTid4u4PgvbN9QXkqZx3SvyHDehfYxERuFRNpFvwLRToYdcioo1Dg-fIU-JxuJPsKb2-K_Po4qppweD5kOyk7OvfzQ6TECoWM0aQoKTilEezgdpbRxwdJdsQr6i-FhRWHfUjlqSsVHg459MHKJuvnfhywZNmHdO84fN_K0pIzXyk-L2zKyvuCT_vzM6c4F_4O5jG0QDPBr-XwNBoTKaJRAcwbZ4CzY9PqBRYaKyEwG8v_COsLzutLKKxY4UQ&src-supplier=Compliance+Statements, ComponentLink11Description=https://octopart.com:443/opatz8j6/c1?t=p2TLJHnNQU5qlsQan8Qpysm1gcHHFkxZ-ir3gws2NIFZsLqSVtVrPAp336WxfVnk66n8wM5ZdsQtScaOMtCZ0-HZvBrFwXHrcbv5Yq5ZC4M4fiY17k1NIHCjlgh28Ac4ncpeiVMqI0LlhO4WwaQqkI3On40VtJzlfvpT4EHZ0vjQWg8L5W01S18c9FU597cVPUSexHR5_RYX72dTAxv6eIsa1ucz0O_omxMQChzLKM3MfI47D4CsQmH93DeZoUoENbS-vDXsp7cmIkWpy2s-NKL21KtClmdxhcpmFaYQdtw3Z2lb7N4evOux36vQ-Hq3rwotWB-tPeVAGeGPz7hT5QqDNb-k613nGWKGo2ZC5B3KxNfn3KKjdOHO&src-supplier=Compliance+Statements, ComponentLink11URL=https://octopart.com:443/opatz8j6/c1?t=p2TLJHnNQU5qlsQan8Qpysm1gcHHFkxZ-ir3gws2NIFZsLqSVtVrPAp336WxfVnk66n8wM5ZdsQtScaOMtCZ0-HZvBrFwXHrcbv5Yq5ZC4M4fiY17k1NIHCjlgh28Ac4ncpeiVMqI0LlhO4WwaQqkI3On40VtJzlfvpT4EHZ0vjQWg8L5W01S18c9FU597cVPUSexHR5_RYX72dTAxv6eIsa1ucz0O_omxMQChzLKM3MfI47D4CsQmH93DeZoUoENbS-vDXsp7cmIkWpy2s-NKL21KtClmdxhcpmFaYQdtw3Z2lb7N4evOux36vQ-Hq3rwotWB-tPeVAGeGPz7hT5QqDNb-k613nGWKGo2ZC5B3KxNfn3KKjdOHO&src-supplier=Compliance+Statements, ComponentLink12Description=https://octopart.com:443/opatz8j6/c1?t=ylxFcKVPDFyVV8TDOeNe2SygdUl2TpVSZVQEynucVw5a7V4jjDZLFfYzFaf7H_lLeCTHkGXJ2DQ-z1VQj5byxs0GYoSLIGId6ICV3C9wF6hSyOJIU0ghU8LwGHMVggKi1sZiGb_MbzI3b07gjVxOCg3Bo0-RzVST-DzPbuHrRJ3vZj3c5JJ3uVum6yD1o5c7hVYNhONRcucMvt-d64AkeyUKu_Xm7TWKf5ylRuodCoH9yHsHLzpxF_GGuQMjgpH0tDWjSb9noWfW0RQYURZfGA5N2YdqPOAnCge0ZMKWql7eCEZx7gpSpDVt1c93h-Js8cbVwBiRv8Idudp0gGjHE_PLdHhIf57-gm8ag3fn972HmQpCOng&src-supplier=Compliance+Statements, ComponentLink12URL=https://octopart.com:443/opatz8j6/c1?t=ylxFcKVPDFyVV8TDOeNe2SygdUl2TpVSZVQEynucVw5a7V4jjDZLFfYzFaf7H_lLeCTHkGXJ2DQ-z1VQj5byxs0GYoSLIGId6ICV3C9wF6hSyOJIU0ghU8LwGHMVggKi1sZiGb_MbzI3b07gjVxOCg3Bo0-RzVST-DzPbuHrRJ3vZj3c5JJ3uVum6yD1o5c7hVYNhONRcucMvt-d64AkeyUKu_Xm7TWKf5ylRuodCoH9yHsHLzpxF_GGuQMjgpH0tDWjSb9noWfW0RQYURZfGA5N2YdqPOAnCge0ZMKWql7eCEZx7gpSpDVt1c93h-Js8cbVwBiRv8Idudp0gGjHE_PLdHhIf57-gm8ag3fn972HmQpCOng&src-supplier=Compliance+Statements, ComponentLink13Description=https://octopart.com:443/opatz8j6/c1?t=M9eWbvfRviNp-qE0okpIKaju1sUmsy1TlbZSrQ4hz6ti2FFsII0CRvIF4K-ij6Ih1P1De_YK24ptP99g8yiUhSLDLjlAiH2DarKOwJ2v1Xxp8Ap5ZX83uv7Mj7XNEk8G2-5N5-FchZSuApQ62O6eyUHvjVEjSxQKGhDO0LPZHX2BcxyvBzyDMwH73uFOgB_V2bL4s3KG_n47l2C9bO1k3Z6ZcFQr4fyVf_uOzwwCkrwcCzwLkH9bvWMYWG65ThUV3LRmvW52i_q9G1Ei4ESL-cP78STGTy9zE8CbxwkkK1brZQL0qn4_4RBfos-ue2_817-VcvY9Ym132jmvLdtzxEpR5mIRKPJTVNLgOY5E14ju5pdFtMXRiabV&src-supplier=Compliance+Statements, ComponentLink13URL=https://octopart.com:443/opatz8j6/c1?t=M9eWbvfRviNp-qE0okpIKaju1sUmsy1TlbZSrQ4hz6ti2FFsII0CRvIF4K-ij6Ih1P1De_YK24ptP99g8yiUhSLDLjlAiH2DarKOwJ2v1Xxp8Ap5ZX83uv7Mj7XNEk8G2-5N5-FchZSuApQ62O6eyUHvjVEjSxQKGhDO0LPZHX2BcxyvBzyDMwH73uFOgB_V2bL4s3KG_n47l2C9bO1k3Z6ZcFQr4fyVf_uOzwwCkrwcCzwLkH9bvWMYWG65ThUV3LRmvW52i_q9G1Ei4ESL-cP78STGTy9zE8CbxwkkK1brZQL0qn4_4RBfos-ue2_817-VcvY9Ym132jmvLdtzxEpR5mIRKPJTVNLgOY5E14ju5pdFtMXRiabV&src-supplier=Compliance+Statements, Export Control Classification Number (ECCN) Code=EAR99, Harmonized Tariff Schedule (HTS) Code=8536.50.70.00, Introduction Date=2023-06-27, Lifecycle Status=Production, Manufacturer Part Number=TS04-66-50-BK-160-SMT-TR, Number of Positions=2, Pricing="5000=0.11349 (USD)", REACH SVHC=Yes, RoHS=Compliant, Supplier=DigiKey
U1: "IC Usb to Uart Bridge QFN24 / Usb Bridge, Usb to Uart Usb 2.0 Uart Interface 24-QFN (4X4)", Ambient Temperature Range High=85°C, Manufacturer="Silicon Lab", Manufacturer Lifecycle Status="FULL PRODUCTION", Max Junction Temperature (Tj)=105°C, Max Supply Voltage=3.6V, Min Operating Temperature=-40°C, Min Supply Voltage=3V, Nominal Supply Voltage (DC)=3.3V, Supplier Part Number=336-5888-1-ND, Temperature Grade=Industrial, Category="USB Interface ICs", China RoHS=Compliant, ComponentLink1Description=https://datasheet.octopart.com:443/CP2102N-A02-GQFN24R-Silicon-Labs-datasheet-138898368.pdf?src-supplier=SHENGYU+ELECTRONICS, ComponentLink1URL=https://datasheet.octopart.com:443/CP2102N-A02-GQFN24R-Silicon-Labs-datasheet-138898368.pdf?src-supplier=SHENGYU+ELECTRONICS, ComponentLink2Description=https://datasheet.octopart.com:443/CP2102N-A02-GQFN24R-Silicon-Labs-datasheet-166051788.pdf?src-supplier=Burklin+Elektronik, ComponentLink2URL=https://datasheet.octopart.com:443/CP2102N-A02-GQFN24R-Silicon-Labs-datasheet-166051788.pdf?src-supplier=Burklin+Elektronik, Data Rate=1.5Mbps, Harmonized Tariff Schedule (HTS) Code=8542.31.00.30, Height=800µm, Height - Seated (Max)=800µm, Interface=UART, Introduction Date=2019-03-12, Length=4mm, Lifecycle Status=Production, Manufacturer Part Number=CP2102N-A02-GQFN24R, Max Operating Temperature=85°C, Number of Digital IO=4, Number of Terminals=24, Pricing="1=5.46, 10=4.14, 25=3.81, 100=3.4474, 250=3.27444, 500=3.1702 (USD)", REACH SVHC=Yes, RoHS=Compliant, Schedule B="8542390000, 8542390000|8542390000|8542390000|8542390000|8542390000", Stock=14627, Supplier=DigiKey, Terminal Pitch=500µm, Width=4mm
U2: "LDO Voltage Regulator, 1 Output, Fixed, 0-15V in, 3.3V Out, 1.2V Drop, 1A out, SOT-223-3", Case/Package=SOP, Dropout Voltage=1.2V, Manufacturer="Diodes Inc.", Max Junction Temperature (Tj)=125°C, Max Supply Voltage=15V, Min Current Limit=1A, Min Input Voltage=5.3V, Min Operating Temperature=-40°C, Min Supply Voltage=4.5V, Nominal Supply Current=4mA, Output Voltage=3.3V, Supplier Part Number=AZ1117IH-3.3TRG1DICT-ND, Voltage Tolerance=2%, Accuracy=1%, Category="LDO Voltage Regulators", China RoHS=Compliant, ComponentLink1Description=https://datasheet.octopart.com:443/AZ1117IH-3.3TRG1-Diodes-Inc.-datasheet-180550926.pdf?src-supplier=IHS, ComponentLink1URL=https://datasheet.octopart.com:443/AZ1117IH-3.3TRG1-Diodes-Inc.-datasheet-180550926.pdf?src-supplier=IHS, ComponentLink2Description=https://datasheet.octopart.com:443/AZ1117IH-3.3TRG1-Diodes-Inc.-datasheet-141402639.pdf?src-supplier=SHENGYU+ELECTRONICS, ComponentLink2URL=https://datasheet.octopart.com:443/AZ1117IH-3.3TRG1-Diodes-Inc.-datasheet-141402639.pdf?src-supplier=SHENGYU+ELECTRONICS, ComponentLink3Description=https://sigma.octopart.com:443/138895852/technical_drawing/Diodes-Inc.-AZ1117IH-3.3TRG1.pdf?src-supplier=Upverter, ComponentLink3URL=https://sigma.octopart.com:443/138895852/technical_drawing/Diodes-Inc.-AZ1117IH-3.3TRG1.pdf?src-supplier=Upverter, Country of Origin="Mainland China", Export Control Classification Number (ECCN) Code=EAR99, Harmonized Tariff Schedule (HTS) Code=8542.39.00.60, Height=1.8mm, Height - Seated (Max)=1.8mm, Introduction Date=2015-12-04, Length=6.5mm, Lifecycle Status=Production, Manufacturer Part Number=AZ1117IH-3.3TRG1, Max Operating Temperature=125°C, Mounting Technology="Surface Mount", Number of Channels=1, Number of Circuits=1, Number of Outputs=1, Number of Regulators=1, Number of Terminals=4, Output Current=1A, Pins=3, Pricing="1=0.3, 10=0.205, 25=0.1812, 50=0.1668, 100=0.1552 (USD)", REACH SVHC=Yes, RoHS=Compliant, Schedule B=8542390000, Stock=27, Supplier=DigiKey, Terminal Pitch=2.3mm, Width=3.5mm
U3: "20.5dBm ESP32-S3FN8 Chip 2.4GHz SMD WiFi Modules ROHS", Manufacturer="Espressif Systems", Supplier Part Number=5407-ESP32-S3-MINI-1-N8DKR-ND, Category="RF Transceiver Modules and Modems", ComponentLink1Description=https://datasheet.octopart.com:443/ESP32-S3-MINI-1-N8-Espressif-Systems-datasheet-194171672.pdf?src-supplier=LCSC, ComponentLink1URL=https://datasheet.octopart.com:443/ESP32-S3-MINI-1-N8-Espressif-Systems-datasheet-194171672.pdf?src-supplier=LCSC, ComponentLink2Description=https://datasheet.octopart.com:443/ESP32-S3-MINI-1-N8-Espressif-Systems-datasheet-188867343.pdf?src-supplier=TME, ComponentLink2URL=https://datasheet.octopart.com:443/ESP32-S3-MINI-1-N8-Espressif-Systems-datasheet-188867343.pdf?src-supplier=TME, ComponentLink3Description=https://datasheet.octopart.com:443/ESP32-S3-MINI-1-N8-Espressif-Systems-datasheet-165560562.pdf?src-supplier=TME, ComponentLink3URL=https://datasheet.octopart.com:443/ESP32-S3-MINI-1-N8-Espressif-Systems-datasheet-165560562.pdf?src-supplier=TME, ComponentLink4Description=https://datasheet.octopart.com:443/ESP32-S3-MINI-1-N8-Espressif-Systems-datasheet-165560559.pdf?src-supplier=TME, ComponentLink4URL=https://datasheet.octopart.com:443/ESP32-S3-MINI-1-N8-Espressif-Systems-datasheet-165560559.pdf?src-supplier=TME, ComponentLink5Description=https://datasheet.octopart.com:443/ESP32-S3-MINI-1-N8-Espressif-Systems-datasheet-192318068.pdf?src-supplier=HQonline, ComponentLink5URL=https://datasheet.octopart.com:443/ESP32-S3-MINI-1-N8-Espressif-Systems-datasheet-192318068.pdf?src-supplier=HQonline, Manufacturer Part Number=ESP32-S3-MINI-1-N8, Pricing="1=5,43, 10=4,703, 25=4,4492, 100=4,0995, 250=3,89008 (USD)", RoHS=Compliant, Stock=7029, Supplier=DigiKey

## Free pads (board coordinates)
  round 60 hole 122.05 unplated: 2(117.99,118.25) 3(117.99,1849.28) 5(2902.01,1850.26)
  round 60 hole 122.05: 6(2887.01,118.25)

## Via types
v1: diameter 24, hole 12, L1 to L4, tented both sides, 141 vias

## Nets (pads, with @x,y where several pads share a name; then routed paths per layer and width w, separated by ;. In a path a pad name is that pad's centre, name@x,y a point inside that pad or via, vN(x,y) a via of type N, cw(c..) or ccw(c..) an arc to the next point about the centre after c; other vN are vias at no path point)
+3V3: C1.2 C2.2 C14.2 C15.2 J1.2 J2.1 J9.3 R1.2 R2.2 R7.2 R8.2 R16.2 R27.2 R28.2 U3.3 | length 7507.8
  L1 w10: v1(708,1067.26) 724.63,1050.63 733.36,1050.63 738.99,1045 R2.2@738.99,1044.26 ; R1.2@999.01,1044.26 1039,1044.26 v1(1060,1065.26) ; v1(1530,950.26) 1560,980.26 1654.95,980.26 1701.5,933.71 R16.2@1701.5,888.67 1722.59,888.67 1730,881.26 1730,635.26 1776,589.26 1832.29,589.26 R7.2@1833.29,588.26
  L1 w15: C14.2@2487.2,1338.26 2488.2,1337.26 C14.2@2489.8,1337.26 ; C14.2@2496.48,1343.95 2491.52,1343.95 2489.8,1342.23 C14.2@2489.8,1337.26 ; J1.2@2550,1666.26 2622.8,1593.46 C1.2@2622.8,1470.26 2622.8,1468.88 2512.5,1358.59 2512.5,1337.26 ; v1(2563,1190.26) 2562.32,1190.94 U3.3@2562.32,1256.85 2562.32,1287.94 2542.11,1308.15 2542.11,1331.95 C15.2@2537.8,1336.26 2536.8,1337.26 2512.5,1337.26 ; C2.2@2625.39,492.13 2650,467.53 J2.1@2650,301.26 ; C14.2@2489.8,1337.26 2512.5,1337.26
  L1 w20: R27.2@1178.61,666.77 R28.2@1178.61,582 1178.61,516.1 1190.33,504.39 1750.6,504.39 1833.29,587.08 R7.2@1833.29,588.26 ; R8.2@1880.02,1399.91 1880.02,1401.1 1880.64,1401.72 1909.38,1401.72 1913.92,1406.26 v1(1915,1406.26)
  L2 w20: v1@2017,482.26 2648,482.26 2650,480.26
  L2 w35: v1(2563,1190.26) 2598.59,1154.67 2598.59,676.04 2650,624.63 2650,480.26 J2.1@2650,301.26
  L2 w40: v1(1915,1406.26) 1931.2,1422.46 2468.8,1422.46 2469,1422.26 2513,1422.26 2550,1385.26 2550,1203.26 v1(2563,1190.26)
  L4 w15: J9.3@56,1573.26 101.8,1619.06 633.07,1619.06 766,1486.13 766,1125.26 v1(708,1067.26) ; 761,1120.26 871.74,1120.26 1081.74,910.26 1490,910.26 v1(1530,950.26) 1491,950.26 1485,944.26 1210,944.26 1089,1065.26 v1(1060,1065.26)
  other v1: 1951,483.26 1981,483.26 2012,483.26 1951,513.26 1981,513.26 2012,513.26
+3V3_REG: C11.2 C12.2 R27.1 R28.1 U2.2 U2.4 | length 841.2
  L1 w15: U2.4@624,747.26 624,724.72 582.72,683.44 582.72,672.98 v1(581,671.26) v1(624,671.26) v1(667,671.26) 668.72,672.98 668.72,741.47 677.51,750.26 U2.2@867.06,750.26 952.39,750.26 952.39,746.19 979,719.57 C11.2@979,669.46 ; C11.2@977.62,669.46 C12.2@1028,669.46 R27.1@1104.22,669.46 ; R28.1@1105.39,582 R27.1@1105.39,666.77
+5V: C6.2 C13.2 J1.22 J5.2 J9.1 U2.3 | length 1687.9
  L1 w40: J9.1@261,1573 456.74,1573 J1.22@548,1664.26 ; J5.2@410,980.26 410.33,980.59 410.33,1030.04 483,1102.7 v1(483,1184) ; 491.5,1447.76 487,1452.26 v1(487,1481.26) 548,1542.26 J1.22@548,1664.26 ; J1.22@550,1666.26 J1.22@548,1664.26 ; v1(751,864.26) 774.45,840.81 U2.3@867.06,840.81 869.35,843.09 934.83,843.09 935,843.26
  L4 w40: J5.2@410,980.26 526,864.26 v1(751,864.26) ; v1(483,1184) 487,1188 v1(487,1481.26)
+5V_VBUS1: C3.2 C4.2 C5.2 D3.5 J3.A4B9 J3.B4A9 J5.1 R9.2 U1.7 | length 2013
  L1 w10: 753.71,1319.29 U1.7@798.98,1319.29
  L1 w15: 185,1357 J3.A4B9@247.64,1357 ; 187.31,1166.69 J3.B4A9@247.64,1166.69 314.65,1166.69
  L1 w30: 185,1357 158,1330 158,1196 187.31,1166.69 ; J5.1@310,980.26 310,1062.22 332.08,1084.3 332.08,1149.26 314.65,1166.69 ; v1(552,1204) 552,1235.48 515.22,1272.26 492.5,1272.26 492.25,1272.51 D3.5@492.25,1277.26 492.25,1282.01 492.5,1282.26 538.62,1282.26 C3.2@620.16,1363.8 688.27,1363.8 695.36,1356.7 716.3,1356.7 753.71,1319.29 ; 552.5,1277.26 603.85,1225.91 649.44,1225.91 661.92,1238.39 661.92,1256.94 R9.2@664.01,1259.02
  L4 w30: J5.1@310,980.26 311,981.26 v1(311,1045) 332,1066 ; v1(353,1424.26) 353,1376.35 332,1355.35 332,1066 ; v1(552,1204) 552,1144 493,1085 351,1085 332,1066
+5V_VBUS2: C10.2 D4.5 J4.A4B9 J4.B4A9 J5.3 | length 1081.8
  L1 w12: C10.2@354.2,732.26 367.95,746.01 388.95,746.01 412.5,722.46 442.7,722.46 465,744.76 D4.5@465,750.01 ; 367.27,746.7 387,766.43 387,792.26 510,915.26 J5.3@510,980.26
  L1 w20: J4.B4A9@247.64,606.85 191.72,606.85 180,618.57 180,782.54 191.72,794.26 246.07,794.26 249.45,797.64 275.45,797.64 299.53,821.72 339.2,861.38 391.12,861.38 J5.3@510,980.26
+VDC: J8.1 J8.2 J8.3 J8.4 J8.5 J8.6 J8.7 J8.8 J8.9 J8.10 J8.11 J8.12 J8.13 J8.14 J8.15 J8.16 J8.17 J8.18 J8.19 J8.20 J8.21 J8.22 J8.23 J8.24 J9.2 J10.1 J10.2 J10.3 J10.4 J10.5 J10.6 J10.7 J10.8 J10.9 J10.10 J10.11 J10.12 J10.13 J10.14 J10.15 J10.16 J10.17 J10.18 J10.19 J10.20 J10.21 J10.22 J10.23 J10.24 | length 6363.9
  L1 w100: J8.24@350,201.26 J8.23@450,201.26 J8.22@550,201.26 J8.21@650,201.26 J8.20@750,201.26 J8.19@850,201.26 J8.18@950,201.26 J8.17@1050,201.26 J8.16@1150,201.26 J8.15@1250,201.26 J8.14@1350,201.26 J8.13@1450,201.26 J8.12@1550,201.26 J8.11@1650,201.26 J8.10@1750,201.26 J8.9@1850,201.26 J8.8@1950,201.26 J8.7@2050,201.26 J8.6@2150,201.26 J8.5@2250,201.26 J8.4@2350,201.26 J8.3@2450,201.26 J8.2@2550,201.26 J8.1@2650,201.26 ; J10.1@352,1768.76 552,1768.76 952,1768.76 1152,1768.76 1452,1768.76 1752,1768.76 2252,1768.76 2452,1768.76 2649.5,1768.76 J10.24@2652,1766.26
  L2 w40: J8.24@350,201.26 345.41,205.85 345.41,223.4 156,412.81 156,1573.26 156,1632.26 286.57,1762.83 348.57,1762.83 J10.1@352,1766.26
+VIO: C7.2 C8.2 C9.2 C18.2 R3.2 U1.5 U1.6 | length 905.8
  L1 w10: U1.6@825.94,1346.26 825.94,1431.71 ; U1.5@845.63,1346.26 845.63,1451.97 C18.2@850.16,1456.5
  L1 w15: v1(624.13,1148) 628.13,1151.99 R3.2@628.13,1185 ; v1(675,1502.7) 681.48,1496.22 700.69,1496.22 C8.2@705,1491.91 C7.2@746,1491.91 750.31,1487.6 758.69,1487.6 784.47,1461.81 795.85,1461.81 C9.2@800.16,1457.5 801.54,1457.5 805.85,1453.19 805.85,1451.81 825.94,1431.71 ; C9.2@802.04,1457 849.66,1457 C18.2@850.16,1456.5
  L4 w15: v1(624.13,1148) 623.31,1148.83 606.17,1148.83 585,1170 585,1450 637.7,1502.7 v1(675,1502.7)
BTN_GPIO0: C17.2 Q2.3 R20.1 SW2.1 SW2.2 | length 1109.3
  L1 w10: Q2.3@1222.42,1406.26 1222.42,1277.53 1228.28,1271.68 SW2.2@1298.5,1271.68 SW2.1@1611.5,1271.68 1615,1275.18 1615,1329.4 1620.86,1335.26 1682.41,1335.26 C17.2@1685,1332.67 1722.59,1332.67 1779,1276.26 1906,1276.26 1954.35,1324.61 R20.1@2097.99,1324.61
CHIP_PU: C16.2 J2.3 Q1.3 R16.1 SW1.1 SW1.2 U3.45 | length 2944.8
  L1 w10: v1(1170,1082.26) 1222.42,1134.68 Q1.3@1222.42,1179.26 ; v1(1221,992.26) 1219,990.26 1219,946.26 1244.4,920.86 1296.52,920.86 SW1.1@1298.5,922.84 SW1.2@1611.5,922.84 ; v1(1675,927.26) 1615.91,927.26 SW1.2@1611.5,922.84 ; C16.2@1701,803.46 1701.25,803.71 1701.25,854.4 R16.1@1701.5,854.65 1700.11,853.26 1638,853.26 1611.5,879.76 SW1.2@1611.5,922.84 ; J2.3@2450,301.26 2550,401.26 2550,600.26 2629.25,679.51 U3.45@2629.25,705.67
  L4 w10: v1(1170,1082.26) 1171,1082.26 1221,1032.26 v1(1221,992.26) ; v1(1675,927.26) 1675.78,927.26 1690.78,942.26 2307,942.26 2333.22,916.04 2443.22,916.04 2595.79,763.47 2595.79,463.05 2465.23,332.49 2465.23,331.11 2450,315.87 J2.3@2450,301.26